# Allegro board Node2.brd
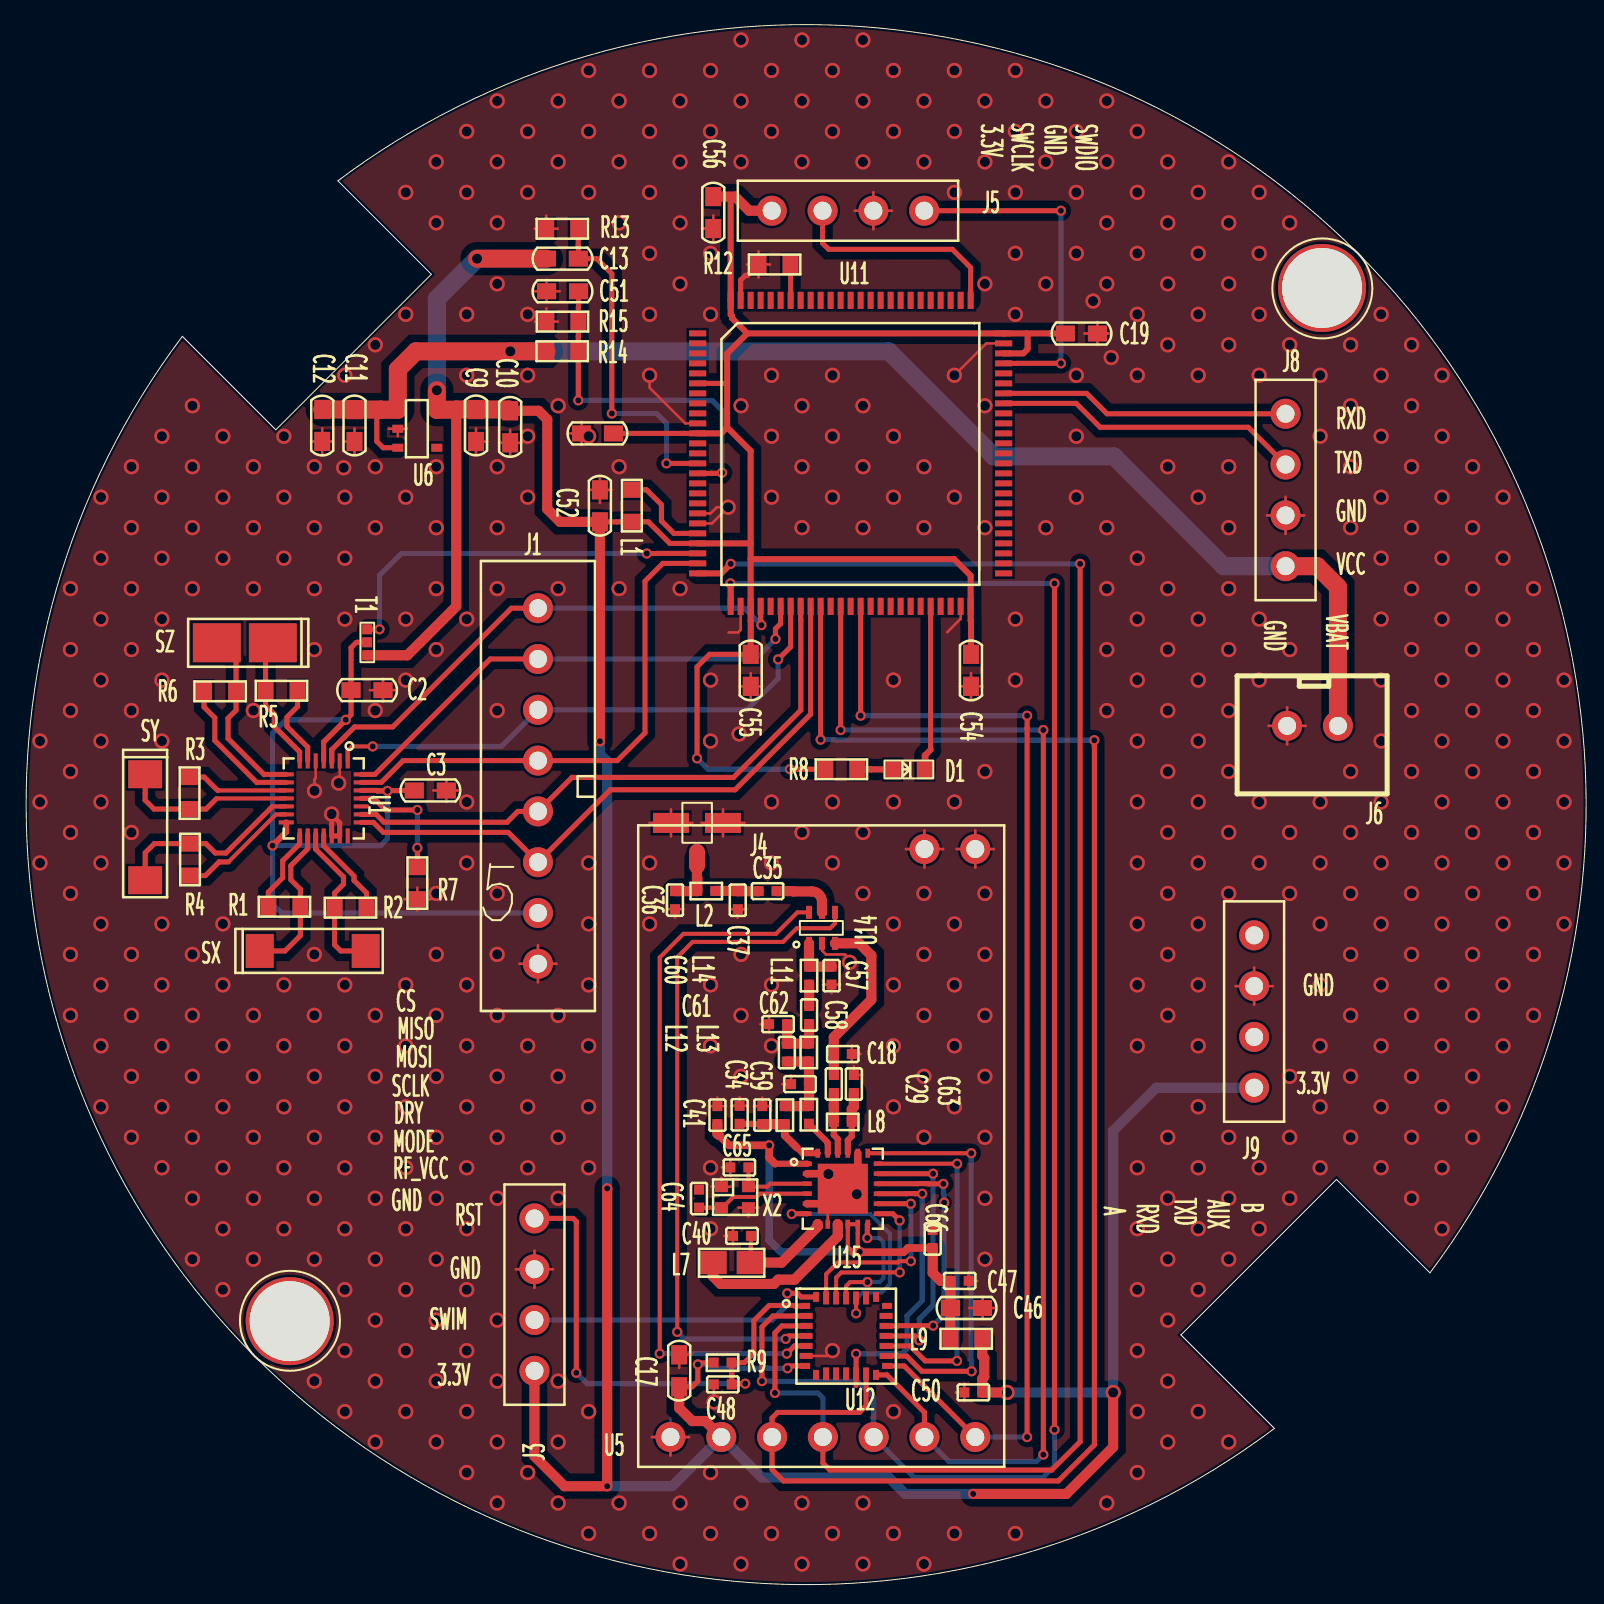
[diagram p0: board, top side]
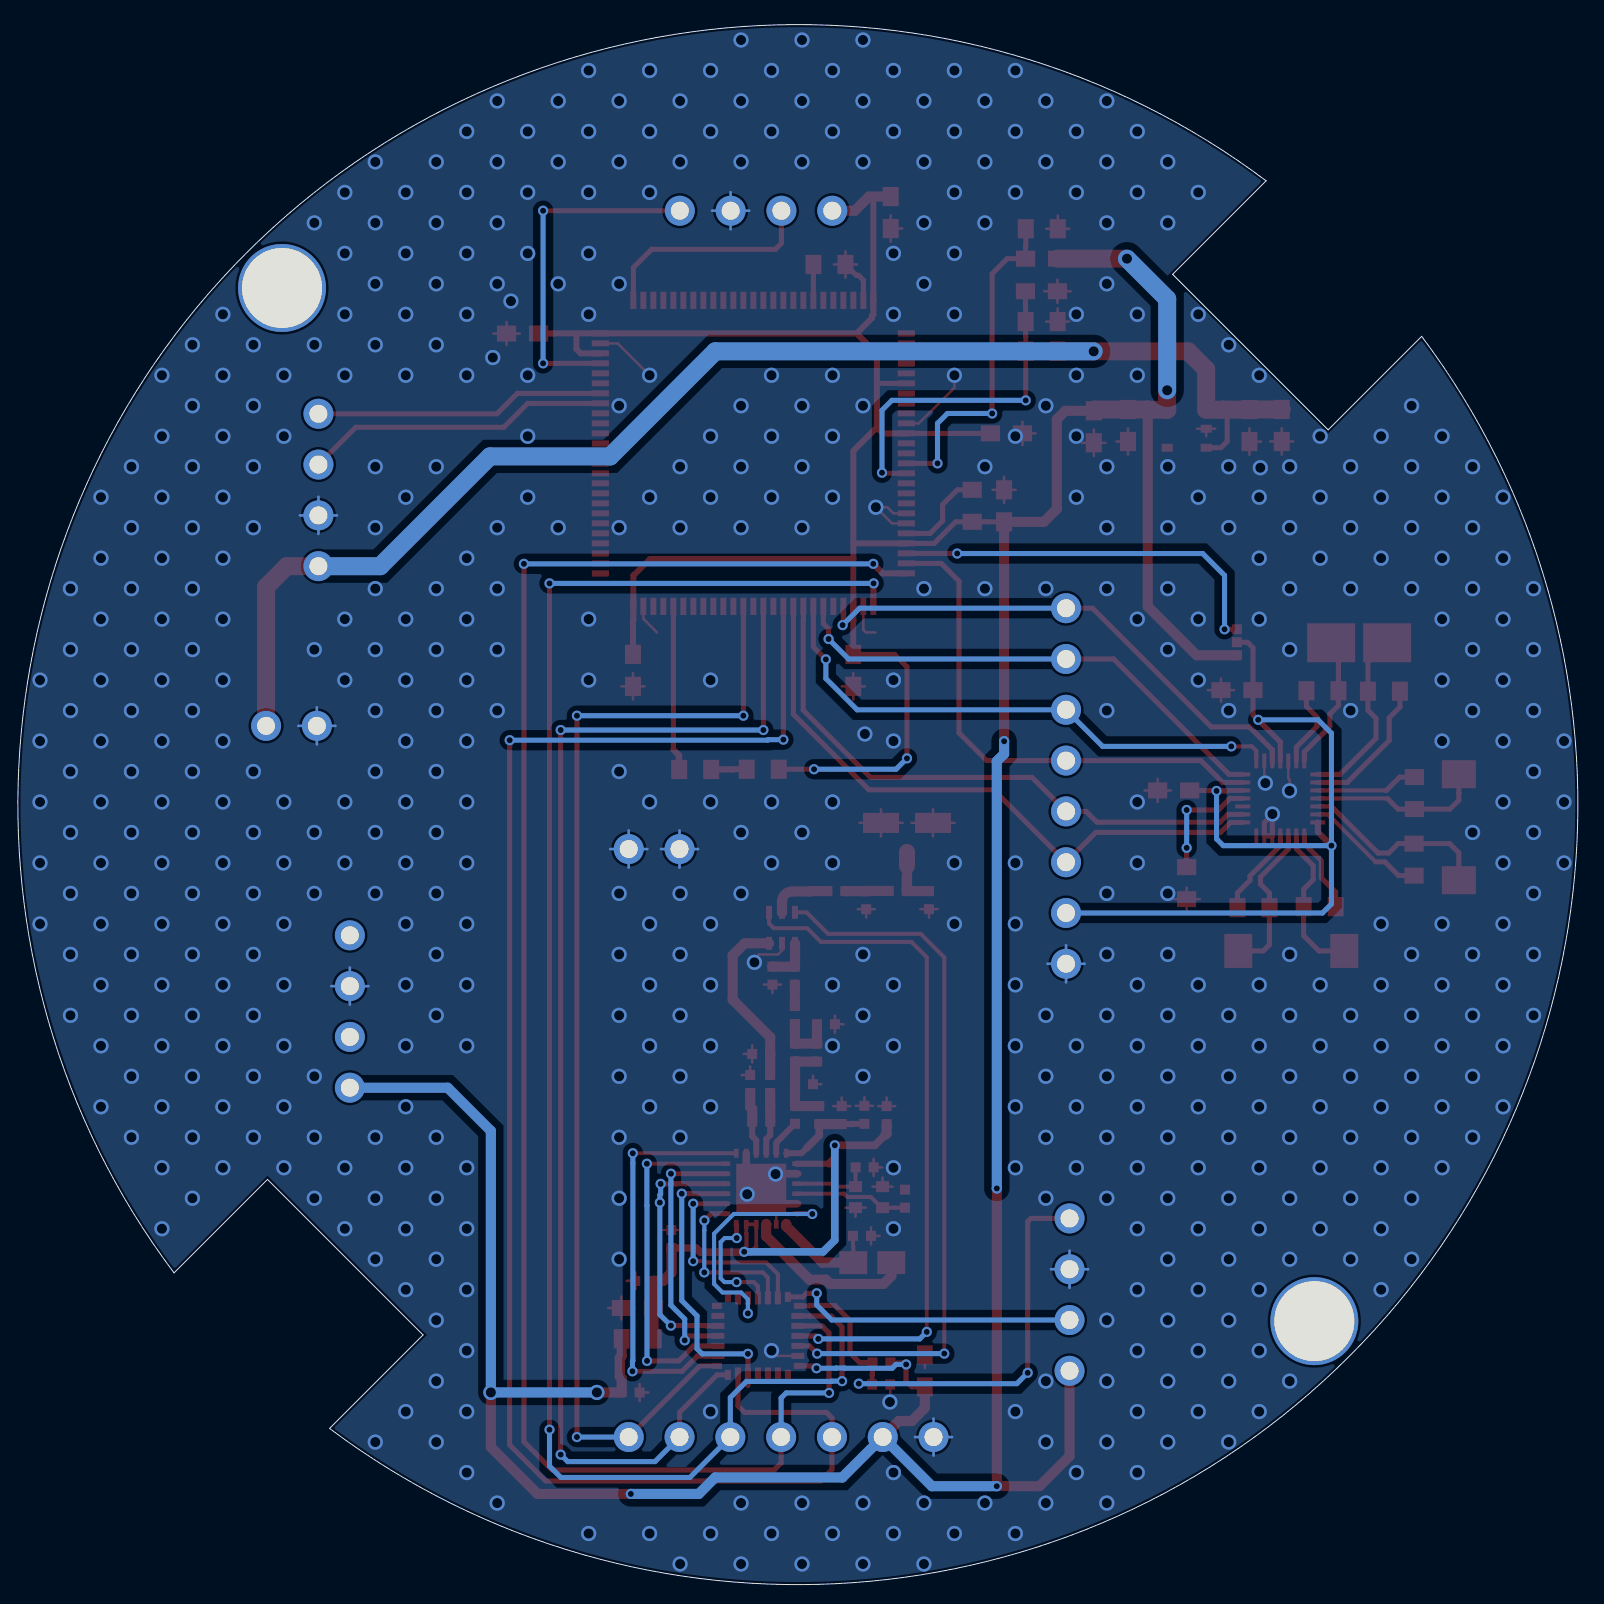
[diagram p1: board, bottom side, seen from below]

Outline 78 x 78 mm; copper layers: TOP, BOTTOM. Coordinates in mm from the lower left corner of the outline.
Outline path: 7.81,62.41 12.48,57.74 20.26,65.52 15.59,70.19 arc(66.58,66.58) 70.19,15.59 65.52,20.26 57.74,12.48 62.41,7.81 arc(11.42,11.42) 7.81,62.41

## Placement (name value [footprint] x y rotation side)
C2  10uF/10V  [C0603]  17.85 44.72 180 top
C3  0.1uF/10V  [C0603]  21.01 39.71 180 top
C9  10uF/10V  [C0603]  22.49 58.75 270 top
C10  0.1uF/10V  [C0603]  24.2 57.09 90 top
C11  10uF/10V  [C0603]  16.42 58.75 270 top
C12  0.1uF/10V  [C0603]  14.81 57.16 90 top
C13  0.1uF/10V  [C0603]  27.61 66.3 180 top
C17  0.1uF/10V  [C0603]  32.65 11.49 270 top
C18  GRM1555C1H1R0CA01  [C0402]  41.28 26.53 180 top
C19  0.1uF/10V  [C0603]  53.57 62.56 180 top
C29  GRM1555C1H4R7CA01#  [C0402]  40.39 24.58 90 top
C34  GRM1555C1H820GA01  [C0402]  35.67 23.94 270 top
C35  GRM1555C1H101JA01#  [C0402]  37.52 34.68 180 top
C36  NC  [C0402]  32.45 33.77 90 top
C37  NC  [C0402]  35.58 33.77 90 top
C40  GRM155R61A474KE15D  [C0402]  35.34 17.44 0 top
C41  GRM155R61A105KE15D  [C0402]  34.56 23.92 270 top
C46  10uF  [C0603]  47.82 13.83 180 top
C47  0.1uF  [C0402]  47.13 15.19 180 top
C48  47P  [C0402]  34.38 10.01 0 top
C50  0.1uF  [C0402]  46.91 9.61 0 top
C51  0.1uF/10V  [C0603]  26.02 64.67 0 top
C52  0.1uF/10V  [C0603]  28.69 54.74 270 top
C53  0.1uF/10V  [C0603]  27.77 57.56 0 top
C54  0.1uF/10V  [C0603]  47.24 44.92 90 top
C55  0.1uF/10V  [C0603]  36.23 44.91 90 top
C56  0.1uF/10V  [C0603]  34.36 67.8 90 top
C57  GRM1555C1H8R2BA01#  [C0402]  40.27 30.9 270 top
C58  GRM1555C1H101JA01  [C0402]  39.15 28.03 90 top
C59  GRM155R71C473KA01J  [C0402]  36.81 23.93 270 top
C60  GRM1555C1H3R6BA01D  [C0402]  38.03 27.05 270 top
C61  NC  [C0402]  38.24 25.02 0 top
C62  GRM1555C1H120GA01  [C0402]  37.15 28.02 0 top
C63  GRM1555C1H3R9BA01#  [C0402]  41.38 25.48 270 top
C64  8.2P  [C0402]  33.65 18.85 90 top
C65  8.2P  [C0402]  36.11 20.86 180 top
C66  GRM155R71C104KA88D  [C0402]  45.33 17.73 270 top
D1  F5F1  [LED0603]  43.34 40.76 0 top
J1  CON8  [CON_2_54_8P]  25.59 48.82 270 top
J3  -  [CON4]  25.42 10.69 90 top
J4  -  [IPX]  33.54 36.29 0 top
J5  -  [CON4]  37.28 68.69 0 top
J6  CON2  [XH_2_54_2P]  63.05 42.94 0 top
J8  -  [CON4]  62.97 58.54 270 top
J9  -  [CON4]  61.4 24.85 90 top
L1  600R@100MHz  [R0603]  30.29 53.14 90 top
L2  CRCW04020000Z0ED  [R0402]  34.46 34.69 180 top
L7  MLZ2012M150W  [R0805]  36.23 16.1 180 top
L8  LQW15AN33NH00D  [R0402]  41.28 23.14 180 top
L9  33nH  [R0603]  47.81 12.29 180 top
L11  LQG15HN18NJ02D  [R0402]  39.15 30 90 top
L12  LQG15HS56NJ02D  [R0402]  37.93 23.93 270 top
L13  33nH  [R0402]  39.14 23.04 90 top
L14  LQG15HS8N2J02D  [R0402]  39.14 26.16 90 top
R1  120/1%  [R0603]  12.11 33.89 0 top
R2  120/1%  [R0603]  17.02 33.84 180 top
R3  120/1%  [R0603]  8.17 40.38 270 top
R4  120/1%  [R0603]  8.19 35.45 90 top
R5  120/1%  [R0603]  13.57 44.69 180 top
R6  120/1%  [R0603]  8.9 44.67 0 top
R7  33K/1%  [R0603]  19.56 34.27 90 top
R8  1K  [R0603]  39.96 40.77 0 top
R9  10K  [R0402]  35.27 11.1 180 top
R12  100K  [R0603]  36.62 66.01 0 top
R13  100K  [R0603]  26 67.8 0 top
R14  100K/1%  [R0603]  27.61 61.67 180 top
R15  100K/1%  [R0603]  26.01 63.15 0 top
SX  INDUCTOR  [SEN-XY-F]  14.33 31.68 0 top
SY  INDUCTOR  [SEN-XY-F]  5.95 37.87 270 top
SZ  INDUCTOR  [SEN-Z-F]  10.94 47.09 180 top
T1  tp_3  [TP3]  17.05 47.12 270 top
T3  TEST  [HOLE4_4X4_0]  64.79 64.83 0 top
T4  TEST  [HOLE4_4X4_0]  13.18 13.18 0 top
U1  -  [13156]  14.88 39.31 270 top
U5  -  [APC340]  32.22 7.38 180 top
U6  XC6234H331VR-G/TPS780330200DDCT  [SOT23-5]  18.59 58.74 0 top
U11  STM32L433VCT6  [LQFP-100]  41.23 56.56 0 top
U12  STM8L151G6U6  [QFN28_NOLEAD_0_5]  41 12.44 0 top
U14  PE4259  [SC-70]  39.14 32.06 90 top
U15  SX1268  [QFN4X4]  40.83 19.8 0 top
X2  EXS00A-CS06465  [2_0X1_6]  34.77 18.85 0 top

## Library data of the parts
C2 C3 C10 C12 C13 C17-C19 C29 C34-C37 C40 C41 C46-C48 C50-C66 = CAP NP
C9 C11 = CAP POL
D1 = F5F1_0
J1 = CON8
J3 J5 J8 J9 = CON4
J4 = IPX
J6 = CON2
L1 L2 L7-L9 L11-L14 SX SY SZ = INDUCTOR
R1-R7 R13-R15 = R
R8 R9 R12 = RESISTOR
T1 = tp_3
T3 T4 = TEST
U1 = 13156_1
U5 = APC340
U6 = XC6234H331VR_0
U11 = STM32L433VCT6
U12 = STM8L151G6U6
U14 = PE4259
U15 = SX1268
X2 = CRY_0

## Footprints (pads in the part's own frame, mm; a bottom-side part is the same pattern mirrored in y, then rotated)
2_0X1_6
  rect 0.65x0.55 smd: 1(0,0) 2(1.35,0) 3(1.35,1.05) 4(0,1.05)
13156
  rect 0.75x0.2 smd: 1(-1.875,1.2) 2(-1.875,0.8) 3(-1.875,0.4) 4(-1.875,0) 5(-1.875,-0.4) 6(-1.875,-0.8) 7(-1.875,-1.2) 15(1.875,-1.2) 16(1.875,-0.8) 17(1.875,-0.4) 18(1.875,0) 19(1.875,0.4) 20(1.875,0.8) 21(1.875,1.2)
  rect 0.2x0.75 smd: 8(-1.2,-1.875) 9(-0.8,-1.875) 10(-0.4,-1.875) 11(0,-1.875) 12(0.4,-1.875) 13(0.8,-1.875) 14(1.2,-1.875) 22(1.2,1.875) 23(0.8,1.875) 24(0.4,1.875) 25(0,1.875) 26(-0.4,1.875) 27(-0.8,1.875) 28(-1.2,1.875)
APC340
  round 1.5 hole 0.9: 1(0,0) 2(-2.54,0) 3(-5.08,0) 4(-7.62,0) 5(-10.16,0) 6(-12.7,0) 7(-15.24,0) 8(-15.24,-29.4) 9(-12.7,-29.4)
C0402
  rect 0.5x0.5 smd: 1(0,0) 2(0.9,0)
C0603
  rect 0.96x0.8 smd: 1(0,0) 2(1.6,0)
CON4
  round 1.5 hole 0.9: 1(0,0) 2(2.54,0) 3(5.08,0) 4(7.62,0)
CON_2_54_8P
  round 1.5 hole 0.9: 1(0,0) 2(2.54,0) 3(5.08,0) 4(7.62,0) 5(10.16,0) 6(12.7,0) 7(15.24,0) 8(17.78,0)
HOLE4_4X4_0
  round 4.4 hole 4: 1(0,0)
IPX
  oval 0.8x1.5 smd: 1(0,0)
  rect 1.8x1 smd: 2(1.3,1.8) 3(-1.3,1.8)
LED0603
  rect 0.8x0.96 smd: 1(0,0) 2(1.6,0)
LQFP-100
  rect 0.86x0.3 smd: 1(-7.65,6) 2(-7.65,5.5) 3(-7.65,5) 4(-7.65,4.5) 5(-7.65,4) 6(-7.65,3.5) 7(-7.65,3) 8(-7.65,2.5) 9(-7.65,2) 10(-7.65,1.5) 11(-7.65,1) 12(-7.65,0.5) 13(-7.65,0) 14(-7.65,-0.5) 15(-7.65,-1) 16(-7.65,-1.5) 17(-7.65,-2) 18(-7.65,-2.5) 19(-7.65,-3) 20(-7.65,-3.5) 21(-7.65,-4) 22(-7.65,-4.5) 23(-7.65,-5) 24(-7.65,-5.5) 25(-7.65,-6) 51(7.65,-6) 52(7.65,-5.5) 53(7.65,-5) 54(7.65,-4.5) 55(7.65,-4) 56(7.65,-3.5) 57(7.65,-3) 58(7.65,-2.5) 59(7.65,-2) 60(7.65,-1.5) 61(7.65,-1) 62(7.65,-0.5) 63(7.65,0) 64(7.65,0.5) 65(7.65,1) 66(7.65,1.5) 67(7.65,2) 68(7.65,2.5) 69(7.65,3) 70(7.65,3.5) 71(7.65,4) 72(7.65,4.5) 73(7.65,5) 74(7.65,5.5) 75(7.65,6)
  rect 0.3x0.86 smd: 26(-6,-7.65) 27(-5.5,-7.65) 28(-5,-7.65) 29(-4.5,-7.65) 30(-4,-7.65) 31(-3.5,-7.65) 32(-3,-7.65) 33(-2.5,-7.65) 34(-2,-7.65) 35(-1.5,-7.65) 36(-1,-7.65) 37(-0.5,-7.65) 38(0,-7.65) 39(0.5,-7.65) 40(1,-7.65) 41(1.5,-7.65) 42(2,-7.65) 43(2.5,-7.65) 44(3,-7.65) 45(3.5,-7.65) 46(4,-7.65) 47(4.5,-7.65) 48(5,-7.65) 49(5.5,-7.65) 50(6,-7.65) 76(6,7.65) 77(5.5,7.65) 78(5,7.65) 79(4.5,7.65) 80(4,7.65) 81(3.5,7.65) 82(3,7.65) 83(2.5,7.65) 84(2,7.65) 85(1.5,7.65) 86(1,7.65) 87(0.5,7.65) 88(0,7.65) 89(-0.5,7.65) 90(-1,7.65) 91(-1.5,7.65) 92(-2,7.65) 93(-2.5,7.65) 94(-3,7.65) 95(-3.5,7.65) 96(-4,7.65) 97(-4.5,7.65) 98(-5,7.65) 99(-5.5,7.65) 100(-6,7.65)
QFN4X4
  rect 0.45x0.23 smd: 1(-1.775,1.25) 2(-1.775,0.75) 3(-1.775,0.25) 4(-1.775,-0.25) 5(-1.775,-0.75) 6(-1.775,-1.25) 13(1.775,-1.25) 14(1.775,-0.75) 15(1.775,-0.25) 16(1.775,0.25) 17(1.775,0.75) 18(1.775,1.25)
  rect 0.23x0.45 smd: 7(-1.25,-1.775) 8(-0.75,-1.775) 9(-0.25,-1.775) 10(0.25,-1.775) 11(0.75,-1.775) 12(1.25,-1.775) 19(1.25,1.775) 20(0.75,1.775) 21(0.25,1.775) 22(-0.25,1.775) 23(-0.75,1.775) 24(-1.25,1.775)
  rect 2.5x2.5 smd: 25(0,0)
QFN28_NOLEAD_0_5
  rect 0.5x0.3 smd: 1(-2.05,1.5) 7(-2.05,-1.5) 15(2.05,-1.5) 21(2.05,1.5)
  rect 0.65x0.3 smd: 2(-2,1) 3(-2,0.5) 4(-2,0) 5(-2,-0.5) 6(-2,-1) 16(2,-1) 17(2,-0.5) 18(2,0) 19(2,0.5) 20(2,1)
  rect 0.3x0.5 smd: 8(-1.5,-1.95) 14(1.5,-1.95) 22(1.5,1.95) 28(-1.5,1.95)
  rect 0.3x0.65 smd: 9(-1,-1.9) 10(-0.5,-1.9) 11(0,-1.9) 12(0.5,-1.9) 13(1,-1.9) 23(1,1.9) 24(0.5,1.9) 25(0,1.9) 26(-0.5,1.9) 27(-1,1.9)
R0402
  rect 0.5x0.5 smd: 1(0,0) 2(0.9,0)
R0603
  rect 0.8x0.96 smd: 1(0,0) 2(1.6,0)
R0805
  rect 1.4x1.15 smd: 1(0,0) 2(1.9,0)
SC-70
  rect 0.65x0.3 smd: 1(0,0) 2(0,-0.65) 3(0,-1.3) 4(1.55,-1.3) 5(1.55,-0.65) 6(1.55,0)
SEN-XY-F
  rect 1.4x1.7 smd: 1(-2.65,0) 2(2.65,0)
SEN-Z-F
  rect 2.4x1.95 smd: 1(-1.4,0) 2(1.4,0)
SOT23-5
  rect 0.55x0.4 smd: 1(0,0) 2(0,-0.95) 3(0,-1.9) 4(1.95,-1.9) 5(1.95,0)
TP3
  rect 0.5x0.5 smd: 1(-0.65,0) 2(0,0) 3(0.65,0)
XH_2_54_2P
  round 1.5 hole 0.9: 1(0,0) 2(2.54,0)

## Nets
GND: C2.1 C3.1 C9.2 C10.1 C11.2 C12.1 C17.1 C18.1 C19.1 C34.1 C36.1 C37.1 C40.1 C41.1 C46.1 C47.1 C48.1 C50.1 C51.1 C52.1 C53.1 C54.1 C55.1 C56.1 C57.2 C59.1 C61.1 C62.1 C63.1 C65.2 C66.1 J1.8 J3.3 J4.2(G#2) J4.3(G#3) J5.3 J6.1 J8.3 J9.3 R7.1 R12.1 R13.1 R15.1 U1.2(RES#2) U1.5(AVSS) U1.19(DVSS) U1.20(RES#20) U5.1(GND#1) U5.8(GND#8) U5.9(GND#9) U6.2(VSSS) U11.10(VSS#10) U11.19(VSSA) U11.20(VREF) U11.27(VSS#27) U11.49(VSS#49) U11.74(VSS#74) U11.99(VSS#99) U12.6(VSS1) U14.2(GND) U15.2(GND#2) U15.5(GND#5) U15.8(GND#8) U15.20(GND#20) U15.25(GND#25) X2.2(G#2) X2.4(G#4)
VBAT_ADC: C51.2 R14.1 R15.2 U11.15(PC0)
VCC: C11.1 C12.2 J6.2 J8.4 R14.2 U6.1(VIN) U6.3(CE)
VCC_3.3V: C9.1 C10.2 C13.2 C17.2 C19.2 C50.2 C52.2 C53.2 C54.2 C55.2 C56.2 J3.1 J5.1 J9.1 L1.1 L9.1 R8.1 R9.2 T1.3(S3#3) U5.2(VCC) U6.5(VOUT) U11.6(VBAT) U11.11(VDD#11) U11.22(VDDA) U11.28(VDD#28) U11.50(VDD#50) U11.73(VDDUSB) U11.75(VDD#75) U11.100(VDD#100) U12.7(VDD1)
VCC_RF: C41.2 C46.2 C47.2 C66.2 L9.2 U15.1(VDD_IN) U15.10(VBAT) U15.11(VBAT_IO)
VCC_RM: C2.2 C3.2 J1.7 T1.2(S3#2) U1.4(AVDD) U1.14(DVDD#14) U1.26(DVDD#26)
BUSY: U12.27(PC6) U15.14(BUSY)
DIO1: U12.26(PC5) U15.13(DIO1)
DIO2: U12.25(PC4) U15.12(DIO2/DATA)
DIO3: U12.24(PC3) U15.6(DIO3)
DIO4: U12.23(PC2)
DIO5: U12.22(PC1)
LORA_A: U5.3(SET_A) U11.35(PB0) U12.13(PB1)
LORA_AUX: U5.6(AUX) U11.37(PB2) U12.14(PB2)
LORA_B: U5.7(SET_B) U11.39(PE8) U12.15(PB3)
LORA_RST: U12.12(PB0) U15.15(NRESET)
LORA_RXD: U5.4(RXD) U11.25(PA2) U12.3(PA3/UART1_RXD)
LORA_TXD: U5.5(TXD) U11.26(PA3) U12.2(PA2/UART1_TXD)
NC1: U1.21(NC1)
NC2: U1.24(NC2)
RM3100_MODE_EN: J1.6 U1.22(I2C) U11.34(PC5)
RM_CS: J1.1 U1.3(SSN) U11.29(PA4)
RM_DRY: J1.5 U1.23(DRDY) U11.33(PC4)
RM_MISO: J1.2 U1.28(MISO) U11.31(PA6)
RM_MOSI: J1.3 U1.1(MOSI) U11.32(PA7)
RM_POWER: T1.1(S1) U11.23(PA0)
RM_SCLK: J1.4 U1.27(SCLK) U11.24(PA1)
RST: C48.2 J3.4 R9.1 U12.1(NRST)
RXD: J8.1 U11.69(PA10)
RXEN: U12.4(PA4) U14.4(CTRL)
SCLK: J5.2 U11.76(PA14)
SPI_MISO: U12.19(PB7/SPI_MISO) U15.16(MISO)
SPI_MOSI: U12.18(PB6/SPI_MOSI) U15.17(MOSI)
SPI_NSS: U12.16(PB4/SPI_NSS) U15.19(NSS)
SPI_SCK: U12.17(PB5/SPI_SCK) U15.18(SCK)
SWDIO: J5.4 U11.72(PA13)
SWIM: J3.2 U12.28(PA0)
TXD: J8.2 U11.68(PA9)
TXEN: U12.5(PA5) U14.6(VDD)
N01396: R1.2 SX.1 U1.16(XINP)
N01588: R2.2 SX.2 U1.17(XINN)
N01671: R3.1 U1.10(YDRVP)
N01689: R3.2 SY.1 U1.11(YINP)
N01747: R4.1 U1.13(YDRVN)
N01751: R4.2 SY.2 U1.12(YINN)
N01826: R5.1 U1.6(ZDRVP)
N01832: R5.2 SZ.1 U1.7(ZINP)
N01841: R6.1 U1.9(ZDRVN)
N01859: R6.2 SZ.2 U1.8(ZINN)
N01987: R7.2 U1.25(REXT)
N0020614: R1.1 U1.15(XDRVP)
N0020617: R2.1 U1.18(XDRVN)
N38925: U11.70(PA11)
N39346: L1.2 U11.21(VREF+)
N39977: R12.2 U11.94(PH3-BOOT0)
N40117: C13.1 R13.2 U11.14(NRST)
N69894: D1.1(ANODE) R8.2
N105609: L13.1 U15.23(RF_O)
N105629: C60.2 C61.2 L12.1 L13.2 L14.1
N105665: C34.2 C59.2 L12.2 U15.24(VR_PA)
N105721: C35.1 U14.5(RFC)
N105725: C35.2 C37.2 L2.1
N105729: C36.2 J4.1(ANT) L2.2
N105809: C18.2 C29.2 U14.3(RF2)
N105813: C29.1 L8.2 U15.22(RFI_N)
N105849: C63.2 L8.1 U15.21(RFI_P)
N105989: C58.1 C60.1 C62.2 L14.2
N106013: C57.1 L11.2 U14.1(RF1)
N106087: C58.2 L11.1
N106359: C64.1 U15.4(XTB) X2.1(IN)
N106387: C65.1 U15.3(XTA) X2.3(OUT)
N106409: L7.2 U15.9(DCC_SW)
N106429: C40.2 L7.1 U15.7(VREG)
N3877695: D1.2(CATHODE) U11.46(PE15)

Pads without a net: C64 2; J9 2 4; T3 1; T4 1; U6 4; U11 1 2 3 4 5 7 8 9 12 13 16 17 18 30 36 38 40 41 42 43 44 45 47 48 51 52 53 54 55 56 57 58 59 60 61 62 63 64 65 66 67 71 77 78 79 80 81 82 83 84 85 86 87 88 89 90 91 92 93 95 96 97 98; U12 8 9 10 11 20 21

## Via types
v1: diameter 0.508, hole 0.305, TOP to BOTTOM, 68 vias
v2: diameter 0.762, hole 0.508, TOP to BOTTOM, 574 vias

## Routing (per net, layer and track width the routed paths; a pad name or vN(x,y) marks a point on that pad's centre or on a via; arc(x,y) is an arc through that point)
GND: length 171.4
  TOP w0.127: J4.2 35.92,38.09 ; J4.2 34.84,37.41 ; J4.2 33.77,38.09 ; J4.2 34.84,38.76 ; R7.1 19.56,34.85 ; R7.1 20.22,34.27 ; R7.1 19.56,33.7 ; R7.1 18.9,34.27 ; J8.3 62.97,54.39 ; J8.3 62.97,52.53 ; J8.3 63.9,53.46 ; J8.3 62.04,53.46 ; U14.2 39.79,31.71 39.99,31.51 40.95,31.51 41.13,31.32 ; C34.1 36.1,23.94 ; C34.1 35.25,23.94 ; C34.1 35.67,24.37 ; 22.49,56.5 C9.2 ; C9.2 22.49,57.81 ; C9.2 23.07,57.15 ; U11.74 48.01,62.06 v2(46.41,60.47) ; 23.62,57.09 C10.1 ; C10.1 24.2,57.75 ; C10.1 24.2,56.43 ; C10.1 24.78,57.09 ; v2(14.42,39.69) 14.42,40.26 14.48,40.32 U1.5 ; X2.4 35.27,19.9 ; X2.4 34.77,20.35 ; X2.4 34.26,19.9 ; 35.61,18.85 X2.2 ; X2.2 36.62,18.85 ; X2.2 36.12,18.4 ; U5.8 47.46,37.71 ; U5.8 48.39,36.78 ; U5.8 46.53,36.78 ; U5.8 47.46,35.85 ; 25.43,63.15 R15.1 ; R15.1 26.59,63.15 ; R15.1 26.01,63.81 ; 18.59,57.42 U6.2 ; U6.2 19.04,57.79 ; U6.2 18.13,57.79 ; J3.3 25.42,16.7 ; J3.3 24.49,15.77 ; J3.3 25.42,14.84 ; J3.3 26.34,15.77 ; J9.3 61.4,30.85 ; J9.3 62.33,29.93 ; J9.3 61.4,29 ; J9.3 60.47,29.93 ; 37.82,25.02 C61.1 38.24,25.45 ; J6.1 63.98,42.94 ; J6.1 63.05,43.87 ; J6.1 63.05,42.01 ; J6.1 62.12,42.94 ; C36.1 32.87,33.77 ; C36.1 32.45,33.35 ; C36.1 32.02,33.77 ; U5.1 33.15,7.38 ; U5.1 32.22,6.45 ; U5.1 31.29,7.38 ; R12.1 37.2,66.01 ; R12.1 36.62,66.67 ; R12.1 36.04,66.01 ; R12.1 36.62,65.35 ; 21.01,39.13 C3.1 ; C3.1 21.67,39.71 ; C3.1 21.01,40.29 ; C3.1 20.35,39.71 ; J1.8 26.52,31.04 ; J1.8 25.59,31.97 ; J1.8 24.66,31.04 ; J1.8 25.59,30.11 ; 31.17,38.09 J4.3 ; J4.3 33.32,38.09 ; J4.3 32.24,38.76 ; J4.3 32.24,37.41 ; 28.11,54.74 C52.1 ; C52.1 29.27,54.74 ; C52.1 28.69,54.08 ; C52.1 28.69,55.4 ; C18.1 41.71,26.53 ; C18.1 41.28,26.96 ; C18.1 41.28,26.11 ; 25.43,67.8 R13.1 ; R13.1 26,68.45 ; R13.1 26.58,67.8 ; 15.84,57.15 C11.2 ; C11.2 16.42,56.49 ; C11.2 16.42,57.81 ; v2(15.63,40.08) 15.68,40.13 U1.2 ; C19.1 54.22,62.56 ; C19.1 53.57,63.13 ; C19.1 52.91,62.56 ; C19.1 53.57,61.98 ; C62.1 37.15,28.45 ; C62.1 37.15,27.59 ; C62.1 36.72,28.02 ; 36.23,44.26 C55.1 ; C55.1 36.81,44.91 ; C55.1 35.65,44.91 ; C55.1 36.23,45.57 ; C48.1 34.38,9.15 v2(34.4,9.13) ; J5.3 43.29,68.69 ; J5.3 42.36,67.77 ; J5.3 42.36,69.62 ; J5.3 41.43,68.69 ; U11.20 34.29,53.06 v2(35.1,53.87) 34.53,53.87 34.22,53.56 U11.19 ; C56.1 34.36,68.46 ; C56.1 33.78,67.8 ; C56.1 34.36,67.15 ; C46.1 48.48,13.83 ; C46.1 47.82,13.25 ; C46.1 47.16,13.83 ; C46.1 47.82,14.41 ; 35.16,33.77 C37.1 ; C37.1 36.01,33.77 ; C37.1 35.58,33.34 ; U5.9 44.92,37.71 ; U5.9 43.99,36.78 ; U5.9 45.85,36.78 ; U5.9 44.92,35.85 ; 46.05,47.62 46.06,47.62 46.73,48.29 U11.49 ; 35.21,20.43 C65.2 ; C65.2 35.21,21.29 ; C65.2 34.78,20.86 ; v2(40.32,11.7) 40.05,11.44 U12.6 ; 47.24,44.26 C54.1 ; C54.1 46.67,44.92 ; C54.1 47.82,44.92 ; C54.1 47.24,45.57 ; 32.65,10.83 C17.1 33.23,11.49 ; 47.13,14.76 C47.1 ; C47.1 47.13,15.62 ; C47.1 47.56,15.19 ; C12.1 14.81,57.82 ; C12.1 15.38,57.16 ; C12.1 14.81,56.5 ; C12.1 14.23,57.16 ; C2.1 17.85,45.3 ; C2.1 17.85,44.15 ; C2.1 17.19,44.72 ; C2.1 18.5,44.72 ; C59.1 37.24,23.93 ; C59.1 36.81,24.35 ; C59.1 36.38,23.93 ; 34.91,17.44 C40.1 ; C40.1 35.34,17.01 ; C40.1 35.34,17.86 ; 46.48,9.61 C50.1 ; C50.1 46.91,9.18 ; C50.1 46.91,10.04 ; 41.81,25.48 C63.1 41.38,25.91 ; C66.1 45.33,18.16 ; C66.1 45.75,17.73 ; C66.1 44.9,17.73 ; C51.1 26.02,65.25 ; C51.1 26.02,64.09 ; C51.1 25.37,64.67 ; C51.1 26.68,64.67 ; 27.77,56.98 C53.1 ; C53.1 27.11,57.56 ; C53.1 27.77,58.14 ; U11.10 32.96,58.06 31.17,59.84 v2(31.17,60.47) ; U15.8 40.08,19.05 U15.25 ; 35.12,47.61 35.6,47.61 35.73,47.74 U11.27 ; 34.13,23.92 C41.1 ; C41.1 34.56,24.35 ; C41.1 34.99,23.92 ; 40.27,29.57 C57.2 ; C57.2 39.84,30 ; C57.2 40.7,30
  TOP w0.254: U11.99 35.73,64.21 35.73,65.22 35.97,65.46 36.08,65.46 R12.1 ; U1.19 U1.20 15.68,38.09 15.3,38.48 15.28,38.46 U1.19
  TOP w0.381: U15.25 40.84,19.8 40.84,19.81 41.24,20.22 41.26,20.22 41.58,20.55 U15.20 ; U15.25 40.08,19.05 U15.5 ; U15.25 40.08,20.55 U15.2
  BOTTOM w0.127: 46.53,36.78 U5.8 ; U5.8 48.39,36.78 ; U5.8 47.46,35.85 ; U5.8 47.46,37.71 ; 41.43,68.69 J5.3 ; J5.3 43.29,68.69 ; J5.3 42.36,69.62 ; J5.3 42.36,67.77 ; J1.8 25.59,31.97 ; J1.8 25.59,30.11 ; J1.8 24.66,31.04 ; J1.8 26.52,31.04 ; 62.12,42.94 J6.1 ; J6.1 63.05,43.87 ; J6.1 63.98,42.94 ; J6.1 63.05,42.01 ; 62.04,53.46 J8.3 ; J8.3 63.9,53.46 ; J8.3 62.97,54.39 ; J8.3 62.97,52.53 ; J3.3 25.42,16.7 ; J3.3 26.34,15.77 ; J3.3 24.49,15.77 ; J3.3 25.42,14.84 ; U5.1 32.22,8.31 ; U5.1 33.15,7.38 ; U5.1 32.22,6.45 ; U5.1 31.29,7.38 ; J9.3 61.4,30.85 ; J9.3 62.33,29.93 ; J9.3 61.4,29 ; J9.3 60.47,29.93 ; U5.9 44.92,37.71 ; U5.9 43.99,36.78 ; U5.9 44.92,35.85 ; U5.9 45.85,36.78
  vias: v2(0.69,42.18) v2(0.69,39.13) v2(0.69,36.08) v2(2.22,49.8) v2(2.22,46.75) v2(2.22,43.7) v2(2.22,40.66) v2(2.22,37.61) v2(2.22,34.56) v2(2.22,31.51) v2(2.22,28.46) v2(3.74,54.37) v2(3.74,51.32) v2(3.74,48.28) v2(3.74,45.23) v2(3.74,42.18) v2(3.74,39.13) v2(3.74,36.08) v2(3.74,33.04) v2(3.74,29.99) v2(3.74,26.94) v2(3.74,23.89) v2(5.27,55.9) v2(5.27,52.85) v2(5.27,49.8) v2(5.27,46.75) v2(5.27,43.7) v2(5.27,37.61) v2(5.27,31.51) v2(5.27,28.46) v2(5.27,25.42) v2(5.27,22.37) v2(6.79,57.42) v2(6.79,54.37) v2(6.79,51.32) v2(6.79,48.28) v2(6.79,45.23) v2(6.79,42.18) v2(6.79,33.04) v2(6.79,29.99) v2(6.79,26.94) v2(6.79,23.89) v2(6.79,20.84) v2(8.31,58.94) v2(8.31,55.9) v2(8.31,52.85) v2(8.31,49.8) v2(8.31,31.51) v2(8.31,28.46) v2(8.31,25.42) v2(8.31,22.37) v2(8.31,19.32) v2(8.31,16.27) v2(9.84,57.42) v2(9.84,54.37) v2(9.84,51.32) v2(9.84,33.04) v2(9.84,29.99) v2(9.84,26.94) v2(9.84,23.89) v2(9.84,20.84) v2(9.84,17.8) v2(9.84,14.75) v2(11.36,55.9) v2(11.36,52.85) v2(11.36,49.8) v2(11.36,43.7) v2(11.36,28.46) v2(11.36,25.42) v2(11.36,22.37) v2(11.36,19.32) v2(11.36,16.27) v2(12.89,57.42) v2(12.89,54.37) v2(12.89,51.32) v2(12.89,29.99) v2(12.89,26.94) v2(12.89,23.89) v2(12.89,20.84) v2(12.89,17.8) v2(14.41,55.9) v2(14.41,52.85) v2(14.41,49.8) v2(14.41,46.75) v2(14.41,31.51) v2(14.41,28.46) v2(14.41,25.42) v2(14.41,22.37) v2(14.41,19.32) v2(14.41,16.27) v2(14.41,10.18) v2(15.27,38.53) v2(15.93,60.47) v2(15.88,55.84) v2(15.93,54.37) v2(15.93,51.32) v2(15.93,48.28) v2(15.93,29.99) v2(15.93,26.94) v2(15.93,23.89) v2(15.93,20.84) v2(15.93,17.8) v2(15.93,14.75) v2(15.93,11.7) v2(15.93,8.65) v2(17.46,61.99) v2(17.46,55.9) v2(17.46,52.85) v2(17.46,43.7) v2(17.46,28.46) v2(17.46,25.42) v2(17.46,22.37) v2(17.46,19.32) v2(17.46,16.27) v2(17.46,13.22) v2(17.46,10.18) v2(17.46,7.13) v2(18.98,69.61) v2(18.98,63.52) v2(18.98,54.37) v2(18.98,48.28) v2(18.98,45.23) v2(18.98,29.99) v2(18.98,26.94) v2(18.98,23.89) v2(18.98,20.84) v2(18.98,17.8) v2(18.98,14.75) v2(18.98,11.7) v2(18.98,8.65) v2(20.51,71.14) v2(20.51,68.09) v2(20.51,55.9) v2(20.51,52.85) v2(20.51,49.8) v2(20.51,46.75) v2(20.51,34.56) v2(20.51,31.51) v2(20.51,28.46) v2(20.51,25.42) v2(20.51,22.37) v2(20.51,19.32) v2(20.51,16.27) v2(20.51,13.22) v2(20.51,10.18) v2(20.51,7.13) v2(22.03,72.66) v2(22.03,69.61) v2(22.03,63.52) v2(22.03,60.47) v2(22.03,48.28) v2(22.03,39.13) v2(22.03,36.08) v2(22.03,29.99) v2(22.03,26.94) v2(22.03,23.89) v2(22.03,20.84) v2(22.03,17.8) v2(22.03,14.75) v2(22.03,11.7) v2(22.03,8.65) v2(22.03,5.6) v2(23.55,74.18) v2(23.55,71.14) v2(23.55,68.09) v2(23.55,65.04) v2(23.55,55.9) v2(23.55,52.85) v2(23.55,49.8) v2(23.55,43.7) v2(23.55,34.56) v2(23.55,31.51) v2(23.55,28.46) v2(23.55,25.42) v2(23.55,22.37) v2(23.55,19.32) v2(23.55,13.22) v2(23.55,10.18) v2(23.55,7.13) v2(23.55,4.08) v2(25.08,72.66) v2(25.08,69.61) v2(25.08,63.52) v2(25.08,60.47) v2(25.08,57.42) v2(25.08,54.37) v2(25.08,26.94) v2(25.08,23.89) v2(25.08,20.84) v2(25.08,5.6) v2(26.6,74.18) v2(26.6,71.14) v2(26.6,58.94) v2(26.6,49.8) v2(26.6,28.46) v2(26.6,25.42) v2(26.6,22.37) v2(26.6,19.32) v2(26.6,10.18) v2(26.6,7.13) v2(26.6,4.08) v2(28.13,75.71) v2(28.13,72.66) v2(28.13,69.61) v2(28.13,57.42) v2(28.13,36.08) v2(28.13,33.04) v2(28.13,29.99) v2(28.13,26.94) v2(28.13,23.89) v2(28.13,20.84) v2(28.13,8.65) v2(28.13,2.56) v2(29.65,74.18) v2(29.65,71.14) v2(29.65,68.09) v2(29.65,55.9) v2(29.65,49.8) v2(29.65,4.08) v2(31.17,75.71) v2(31.17,72.66) v2(31.17,69.61) v2(31.17,66.56) v2(31.17,63.52) v2(31.17,36.08) v2(31.17,33.04) v2(31.17,2.56) v2(32.7,74.18) v2(32.7,71.14) v2(32.7,68.09) v2(32.7,65.04) v2(32.7,49.8) v2(32.7,4.08) v2(32.7,1.03) v2(34.22,75.71) v2(34.22,72.66) v2(34.22,66.56) v2(34.22,63.52) v2(34.22,45.23) v2(34.22,42.18) v2(34.22,29.99) v2(34.22,26.94) v2(34.22,20.84) v2(34.22,17.8) v2(34.22,5.6) v2(34.22,2.56) v2(35.65,42.53) v2(35.75,77.23) v2(35.75,74.18) v2(35.75,71.14) v2(35.75,58.94) v2(35.75,31.51) v2(35.75,28.46) v2(35.75,25.42) v2(35.75,4.08) v2(35.75,1.03) v2(37.27,75.71) v2(37.27,72.66) v2(37.27,60.47) v2(37.27,57.42) v2(37.27,54.37) v2(37.27,39.13) v2(37.27,36.08) v2(37.27,29.99) v2(37.27,26.94) v2(37.27,2.56) v2(38.79,77.23) v2(38.79,74.18) v2(38.79,71.14) v2(38.79,58.94) v2(38.79,55.9) v2(38.79,52.85) v2(38.79,37.61) v2(38.79,4.08) v2(38.79,1.03) v2(40.11,20.53) v2(40.32,75.71) v2(40.32,72.66) v2(40.32,60.47) v2(40.32,57.42) v2(40.32,54.37) v2(40.32,39.13) v2(40.32,36.08) v2(40.32,2.56) v2(41.17,31.11) v2(41.53,19.52) v2(41.84,77.23) v2(41.84,74.18) v2(41.84,71.14) v2(41.84,58.94) v2(41.84,55.9) v2(41.84,52.85) v2(41.84,37.61) v2(41.84,34.56) v2(41.84,4.08) v2(41.84,1.03) v2(43.37,75.71) v2(43.37,72.66) v2(43.37,57.42) v2(43.37,54.37) v2(43.37,45.23) v2(43.37,39.13) v2(43.37,33.04) v2(43.37,29.99) v2(43.37,26.94) v2(43.37,23.89) v2(43.37,8.65) v2(43.37,2.56) v2(44.89,74.18) v2(44.89,71.14) v2(44.89,55.9) v2(44.89,52.85) v2(44.89,34.56) v2(44.89,31.51) v2(44.89,28.46) v2(44.89,25.42) v2(44.89,22.37) v2(44.89,1.03) v2(46.41,75.71) v2(46.41,72.66) v2(46.41,69.61) v2(46.41,54.37) v2(46.41,39.13) v2(46.41,33.04) v2(46.41,29.99) v2(46.41,26.94) v2(46.41,23.89) v2(46.41,2.56) v2(47.94,74.18) v2(47.94,71.14) v2(47.94,65.04) v2(47.94,58.94) v2(47.94,52.85) v2(47.94,40.66) v2(47.94,34.56) v2(47.94,31.51) v2(47.94,28.46) v2(47.94,25.42) v2(47.94,22.37) v2(47.94,19.32) v2(47.94,16.27) v2(49.46,75.71) v2(49.46,72.66) v2(49.46,69.61) v2(49.46,66.56) v2(49.46,63.52) v2(49.46,48.28) v2(49.46,45.23) v2(49.46,2.56) v2(50.99,74.18) v2(50.99,71.14) v2(50.99,65.04) v2(50.99,52.85) v2(52.51,72.66) v2(52.51,69.61) v2(52.51,66.56) v2(52.51,60.47) v2(52.51,57.42) v2(52.51,54.37) v2(53.35,64.18) v2(54.03,74.18) v2(54.03,71.14) v2(54.03,68.09) v2(54.03,65.04) v2(54.03,52.85) v2(54.03,49.8) v2(54.03,46.75) v2(54.03,43.7) v2(54.03,4.08) v2(54.25,61.35) v2(55.56,72.66) v2(55.56,69.61) v2(55.56,66.56) v2(55.56,63.52) v2(55.56,60.47) v2(55.56,51.32) v2(55.56,48.28) v2(55.56,45.23) v2(55.56,42.18) v2(55.56,39.13) v2(55.56,36.08) v2(55.56,33.04) v2(55.56,29.99) v2(55.56,26.94) v2(55.56,20.84) v2(55.56,17.8) v2(55.56,14.75) v2(55.56,11.7) v2(55.56,8.65) v2(55.56,5.6) v2(57.08,71.14) v2(57.08,68.09) v2(57.08,65.04) v2(57.08,61.99) v2(57.08,55.9) v2(57.08,49.8) v2(57.08,46.75) v2(57.08,43.7) v2(57.08,40.66) v2(57.08,37.61) v2(57.08,34.56) v2(57.08,31.51) v2(57.08,28.46) v2(57.08,22.37) v2(57.08,19.32) v2(57.08,16.27) v2(57.08,13.22) v2(57.08,10.18) v2(57.08,7.13) v2(58.61,69.61) v2(58.61,66.56) v2(58.61,63.52) v2(58.61,60.47) v2(58.61,54.37) v2(58.61,48.28) v2(58.61,45.23) v2(58.61,42.18) v2(58.61,39.13) v2(58.61,36.08) v2(58.61,33.04) v2(58.61,29.99) v2(58.61,26.94) v2(58.61,23.89) v2(58.61,20.84) v2(58.61,17.8) v2(58.61,14.75) v2(58.61,8.65) v2(60.13,71.14) v2(60.13,68.09) v2(60.13,65.04) v2(60.13,61.99) v2(60.13,55.9) v2(60.13,52.85) v2(60.13,49.8) v2(60.13,46.75) v2(60.13,43.7) v2(60.13,40.66) v2(60.13,37.61) v2(60.13,34.56) v2(60.13,22.37) v2(60.13,19.32) v2(60.13,16.27) v2(60.13,7.13) v2(61.65,69.61) v2(61.65,66.56) v2(61.65,63.52) v2(61.65,60.47) v2(61.65,48.28) v2(61.65,45.23) v2(61.65,39.13) v2(61.65,36.08) v2(61.65,20.84) v2(61.65,17.8) v2(63.18,68.09) v2(63.18,61.99) v2(63.18,46.75) v2(63.18,37.61) v2(63.18,34.56) v2(63.18,25.42) v2(63.18,22.37) v2(63.18,19.32) v2(64.7,60.47) v2(64.7,57.42) v2(64.7,39.13) v2(64.7,36.08) v2(64.7,33.04) v2(64.7,29.99) v2(64.7,26.94) v2(64.7,23.89) v2(64.7,20.84) v2(66.23,61.99) v2(66.23,58.94) v2(66.23,55.9) v2(66.23,52.85) v2(66.23,40.66) v2(66.23,37.61) v2(66.23,34.56) v2(66.23,31.51) v2(66.23,28.46) v2(66.23,25.42) v2(66.23,22.37) v2(67.75,63.52) v2(67.75,60.47) v2(67.75,57.42) v2(67.75,54.37) v2(67.75,51.32) v2(67.75,48.28) v2(67.75,45.23) v2(67.75,42.18) v2(67.75,39.13) v2(67.75,36.08) v2(67.75,33.04) v2(67.75,29.99) v2(67.75,26.94) v2(67.75,23.89) v2(67.75,20.84) v2(69.27,61.99) v2(69.27,58.94) v2(69.27,55.9) v2(69.27,52.85) v2(69.27,49.8) v2(69.27,46.75) v2(69.27,43.7) v2(69.27,40.66) v2(69.27,37.61) v2(69.27,34.56) v2(69.27,31.51) v2(69.27,28.46) v2(69.27,25.42) v2(69.27,22.37) v2(69.27,19.32) v2(70.8,60.47) v2(70.8,57.42) v2(70.8,54.37) v2(70.8,51.32) v2(70.8,48.28) v2(70.8,45.23) v2(70.8,42.18) v2(70.8,39.13) v2(70.8,36.08) v2(70.8,33.04) v2(70.8,29.99) v2(70.8,26.94) v2(70.8,23.89) v2(70.8,20.84) v2(70.8,17.8) v2(72.32,55.9) v2(72.32,52.85) v2(72.32,49.8) v2(72.32,46.75) v2(72.32,43.7) v2(72.32,40.66) v2(72.32,37.61) v2(72.32,34.56) v2(72.32,31.51) v2(72.32,28.46) v2(72.32,25.42) v2(72.32,22.37) v2(73.85,54.37) v2(73.85,51.32) v2(73.85,48.28) v2(73.85,45.23) v2(73.85,42.18) v2(73.85,39.13) v2(73.85,36.08) v2(73.85,33.04) v2(73.85,29.99) v2(73.85,26.94) v2(73.85,23.89) v2(75.37,49.8) v2(75.37,46.75) v2(75.37,43.7) v2(75.37,40.66) v2(75.37,37.61) v2(75.37,34.56) v2(75.37,31.51) v2(75.37,28.46) v2(76.89,45.23) v2(76.89,42.18) v2(76.89,39.13) v2(76.89,36.08) v2(76.89,33.04)
VBAT_ADC: length 17.2
  TOP w0.254: U11.15 34.26,55.56 34.26,55.57 34.77,55.57 v1(34.79,55.59) ; C51.2 27.62,63.9 27.61,63.89 R15.2 27.61,62.42 27.61,62.41 R14.1 v1(27.61,59.21)
  BOTTOM w0.254: v1(27.61,59.21) 34.3,59.21 34.79,58.72 v1(34.79,55.59)
VCC: length 69.7
  TOP w0.254: U6.3 17.85,56.84 17.53,57.16 17.53,58.55 17.73,58.74
  TOP w0.9: J8.4 64.55,50.92 65.59,49.88 J6.2 ; R14.2 26,61.66 v2(24.21,61.66) 19.49,61.66 18.59,60.76 U6.1 17.73,58.74 17.73,58.75 C11.1 16.41,58.76 C12.2
  BOTTOM w0.9: J8.4 59.88,50.92 54.39,56.41 48.39,56.41 43.13,61.66 v2(24.21,61.66)
VCC_3.3V: length 260.8
  TOP w0.254: R9.2 34.36,11.09 33.67,11.09 v1(33.59,11.01) 33.59,10.17 33.31,9.89 C17.2 ; C52.2 29.55,53.14 29.55,53.14 L1.1 31.11,53.14 32.19,52.06 U11.22 ; v1(33.55,41.31) 33.55,45.89 34.17,46.51 C55.2 ; U11.11 32.89,57.56 32.89,57.56 C53.2 ; v1(38.07,10.82) 38.18,10.94 U12.7 ; R8.1 v1(38.19,40.77) ; U11.6 35.05,60.06
  TOP w0.3: 35.05,57.86 36.23,56.69 36.23,52.06 ; 35.05,57.86 34.75,57.56 U11.11 ; 35.05,57.86 35.05,61.55 36.06,62.56 ; 36.06,62.56 U11.75 50.01,62.56 ; 36.06,62.56 35.3,63.32 35.3,63.43 35.23,63.51 35.23,64.21 ; 35.23,64.21 U11.100 35.23,64.21 ; 35.23,64.21 35.23,69.19 35.44,69.4 ; C54.2 47.24,48.19 47.23,48.21 U11.50 47.23,50.45 46.4,51.28 36.25,51.28 36.23,51.29 ; C19.2 51.21,62.56 51.2,62.56 50.01,62.56 ; 50.01,62.56 50.07,62.5 50.07,61.77 49.86,61.56 U11.73 ; 36.23,51.29 36.23,52.06 ; 36.23,51.29 36.23,48.91 ; 36.23,52.06 U11.22 ; 36.23,48.91 36.23,48.21 36.23,48.2 C55.2 ; 36.23,48.91 U11.28 36.23,48.91
  TOP w0.508: v1(29.05,19.81) v1(29.05,4.92) 26.92,4.92 25.42,6.42 J3.1 ; C10.2 25.62,58.69 26.05,58.26 26.05,53.78 26.7,53.14 C52.2 v1(28.69,42.17) ; v1(47.35,4.53) 52.01,4.53 54.35,6.88 v2(54.35,9.61) ; L9.1 47.81,11.43 47.91,11.33 47.91,10.4 47.81,10.31 C50.2 v2(49.05,9.61) ; C17.2 32.65,8.83 33.3,8.18 33.96,8.18 U5.2 ; J5.1 36.15,68.69 35.44,69.4 C56.2 ; T1.3 19.06,46.47 21.51,48.91 21.51,58.74
  TOP w0.9: v2(20.54,59.72) U6.5 21.51,58.74 21.52,58.75 C9.1 24.14,58.75 C10.2 ; v2(22.55,66.3) C13.2
  BOTTOM w0.254: v1(38.19,40.77) 34.09,40.77 v1(33.55,41.31) ; v1(38.07,10.82) 37.09,10.82 37.08,10.83 36.66,10.83 36.65,10.82 34.29,10.82 34.09,11.01 v1(33.59,11.01)
  BOTTOM w0.508: v1(29.05,19.81) 29.05,41.17 28.69,41.54 v1(28.69,42.17) ; v1(47.35,4.53) 43.96,4.53 43.13,5.36 36.78,5.36 U5.2 32.3,4.92 v1(29.05,4.92) ; J9.1 56.51,24.85 54.35,22.69 v2(54.35,9.61) v2(49.05,9.61)
  BOTTOM w0.9: v2(22.55,66.3) 20.54,64.29 v2(20.54,59.72)
VCC_RF: length 28.2
  TOP w0.203: v1(41.69,16.64) 41.58,16.75 41.58,17.56 41.58,17.57 U15.11 U15.10 41.08,16.89 41.35,16.62
  TOP w0.305: U15.1 37.45,21.05
  TOP w0.381: 34.63,22.49 35.15,21.97 v1(37.15,21.97) 37.15,21.39 37.16,21.39 37.16,21.33 37.45,21.05 ; 41.35,16.62 43.88,16.62 44.09,16.83 C66.2
  TOP w0.508: C41.2 34.56,22.56 34.63,22.49 ; C66.2 45.33,15.59 45.73,15.19 C47.2 46.22,15.18 C46.2 46.21,13.82 L9.2
  BOTTOM w0.381: v1(37.15,21.97) 37.15,17.22 37.74,16.64 v1(41.69,16.64)
VCC_RM: length 47.6
  TOP w0.254: U1.4 14.88,42.12 ; 14.88,42.12 16.25,43.49 C2.2 16.25,46.85 16.51,47.11 16.54,47.11 16.55,47.12 T1.2 ; 14.88,42.12 14.88,42.14 v1(15.98,43.24) ; U1.26 17.53,39.71 17.55,39.7 ; 17.55,39.7 18.67,39.7 18.68,39.71 C3.2 ; 17.55,39.7 17.56,39.69 v1(18.07,39.69)
  TOP w0.3: U1.14 13,37.63 v1(12.32,36.95)
  BOTTOM w0.254: v1(15.98,43.24) 12.99,43.24 12.32,42.57 v1(12.32,36.95) ; v1(12.32,36.95) 12.32,34.03 12.77,33.58 J1.7 ; v1(12.32,36.95) 17.73,36.95 18.07,37.29 v1(18.07,39.69)
BUSY: length 10.2
  TOP w0.203: v1(44.23,16.17) 43.64,16.17 43.58,16.11 40.59,16.11 40,15.52 U12.27
  TOP w0.254: U15.14 v1(44.23,19.05)
  BOTTOM w0.254: v1(44.23,19.05) v1(44.23,16.17)
DIO1: length 8.1
  TOP w0.203: U12.26 40.5,15.35 40.76,15.61 43.2,15.61 v1(43.68,15.61)
  TOP w0.254: v1(43.67,18.21) 43.34,18.55 U15.13
  BOTTOM w0.203: v1(43.67,18.21) 43.67,17.73 43.68,17.72 v1(43.68,15.61)
DIO2: length 6
  TOP w0.203: U12.25 41,14.92 41.2,15.13 v1(42.06,15.13)
  TOP w0.254: U15.12 42.06,18 v1(42.06,17.33)
  BOTTOM w0.203: v1(42.06,17.33) 42.66,17.33 42.86,17.13 42.86,15.32 42.67,15.13 v1(42.06,15.13)
DIO3: length 12.1
  TOP w0.203: U12.24 v1(41.5,13.56)
  TOP w0.254: U15.6 38.29,18.55 v1(38.28,18.53)
  BOTTOM w0.203: v1(41.5,13.56) 41.5,14.04 41.49,14.05 41.49,14.26 41.84,14.61 42.77,14.61 43.19,15.03 43.19,17.55 42.2,18.53 v1(38.28,18.53)
LORA_A: length 81.8
  TOP w0.254: U11.35 v1(39.73,42.25) ; U12.13 42,8.94 41.67,8.61 37.58,8.61 37.3,8.33 U5.3 37.3,5.75 37.87,5.18 51.61,5.18 53.41,6.99 53.41,41.91 53.41,41.92 v1(53.41,42.22)
  BOTTOM w0.254: v1(53.41,42.22) 40.52,42.22 40.49,42.25 v1(39.73,42.25)
LORA_AUX: length 63.6
  TOP w0.254: U5.6 44.92,8.61 43.04,10.49 U12.14 ; U11.37 v1(40.73,42.73) ; v1(50.86,6.5) v1(50.86,42.73)
  BOTTOM w0.254: v1(50.86,6.5) 50.51,6.15 46.15,6.15 U5.6 ; v1(40.73,42.73) v1(50.86,42.73)
LORA_B: length 58.3
  TOP w0.254: v1(50.05,7.38) 50.05,42.83 v1(50.05,43.45) ; U12.15 43.9,10.94 U5.7 ; U11.39 v1(41.73,43.45)
  BOTTOM w0.254: v1(41.73,43.45) v1(50.05,43.45) ; U5.7 v1(50.05,7.38)
LORA_RST: length 14.5
  TOP w0.254: U15.15 44.02,19.55 44.02,19.55 44.45,19.55 44.45,19.55 v1(44.81,19.55) ; v1(41.5,11.54) 41.5,10.54 U12.12 41.5,9.96
  BOTTOM w0.254: v1(44.81,19.55) 44.81,14.2 44.04,13.44 44.04,11.79 43.79,11.54 v1(41.5,11.54)
LORA_RXD: length 87.3
  TOP w0.254: U5.4 39.84,6.08 40.19,5.73 51.28,5.73 52.7,7.15 v1(52.7,51.04) ; U12.3 37.79,12.94 37.44,12.59 v1(37.44,9.58)
  TOP w0.305: v1(35.23,51.04) 34.75,50.56 U11.25
  BOTTOM w0.254: v1(37.44,9.58) 39.58,9.58 39.84,9.33 U5.4 ; v1(52.7,51.04) v1(35.23,51.04)
LORA_TXD: length 84.7
  TOP w0.254: v1(51.42,50.06) v1(51.42,7.75) ; v1(36.79,10.17) 36.79,12.88 37.34,13.43 38.41,13.43 38.42,13.44 U12.2
  TOP w0.305: U11.26 35.23,48.91 35.23,50.05 v1(35.21,50.06)
  BOTTOM w0.254: v1(51.42,7.75) 51.42,5.93 50.85,5.36 44.4,5.36 U5.5 42.38,9.36 41.57,10.16 37.31,10.16 37.3,10.17 v1(36.79,10.17) ; v1(35.21,50.06) v1(51.42,50.06)
RM3100_MODE_EN: length 31.8
  TOP w0.254: U1.22 17.36,38.11 17.86,37.61 24.1,37.61 J1.6 29.21,39.74 35.44,39.74 39.23,43.52 U11.34
RM_CS: length 26.9
  TOP w0.254: U11.29 36.73,48.91 36.73,48.01 v1(36.76,47.98) ; U1.3 15.28,41.74 ; 15.28,41.74 16.42,42.88 18.33,42.88 24.27,48.82 J1.1 ; 15.28,41.74 15.28,41.74 15.28,41.07
  BOTTOM w0.254: v1(36.76,47.98) 35.92,48.82 J1.1
RM_DRY: length 29.7
  TOP w0.254: U11.33 38.73,48.91 38.73,48.23 38.73,48.22 38.73,43.73 35.37,40.36 27.29,40.36 J1.5 24.59,38.66 24.05,38.12 17.89,38.12 17.5,38.51 U1.23
RM_MISO: length 25.3
  TOP w0.254: v1(37.47,47.28) 37.47,47.79 37.73,48.05 37.73,48.91 U11.31 ; U1.28 17.44,40.51 23.21,46.28 J1.2
  BOTTOM w0.254: J1.2 36.47,46.28 v1(37.47,47.28)
RM_MOSI: length 27.4
  TOP w0.203: v1(17.33,41.91) 16.3,41.91 16.08,41.69 U1.1
  TOP w0.254: U11.32 38.23,48.91 38.23,46.89 v1(37.6,46.26)
  BOTTOM w0.254: v1(37.6,46.26) 37.6,45.31 36.04,43.74 J1.3 23.76,41.91 v1(17.33,41.91)
RM_POWER: length 19.7
  TOP w0.254: v1(31.04,51.56) 31.54,51.56 31.55,51.56 U11.23 ; T1.1 v1(17.67,47.77)
  BOTTOM w0.254: v1(31.04,51.56) 18.76,51.56 17.67,50.46 v1(17.67,47.77)
RM_SCLK: length 25.8
  TOP w0.254: U11.24 31.84,51.06 30.94,50.17 30.94,42.59 29.56,41.2 J1.4 18.85,41.2 17.76,40.11 U1.27
RST: length 26
  TOP w0.254: U12.1 38.45,13.94 38.42,13.96 37.15,13.96 36.39,13.19 36.39,11.58 35.91,11.1 R9.1 35.27,10.52 35.28,10.51 C48.2 35.32,10.05 v1(35.96,10.05) ; J3.4 27.35,18.31 27.51,18.16 v1(27.51,10.59)
  BOTTOM w0.254: v1(35.96,10.05) 28.05,10.05 v1(27.51,10.59)
RXD: length 14.5
  TOP w0.254: J8.1 54.04,58.54 53.02,59.56 U11.69
RXEN: length 34.5
  TOP w0.203: v1(32.56,12.64) 32.56,31.37 33.32,32.14 37.85,32.14 38.53,32.82 40.2,32.82 40.44,33.06 U14.4
  TOP w0.254: v1(37.98,12.29) 38.13,12.44 U12.4
  BOTTOM w0.254: v1(32.56,12.64) 32.91,12.29 v1(37.98,12.29)
SCLK: length 11.2
  TOP w0.254: U11.76 47.23,65.85 46.31,66.77 40.13,66.77 39.82,67.07 J5.2
SPI_MISO: length 13
  TOP w0.254: U15.16 44.59,20.05 44.6,20.05 45.02,20.05 45.02,20.05 45.13,20.05 45.14,20.04 v1(45.86,20.04) ; U12.19 43.58,12.94 43.59,12.95 v1(45.35,12.95)
  BOTTOM w0.254: v1(45.35,12.95) 45.9,13.5 v1(45.9,19.1) 45.9,19.49 45.86,19.53 v1(45.86,20.04)
SPI_MOSI: length 13.1
  TOP w0.254: U15.17 v1(45.35,20.55) ; v1(44.66,12.21) 44.44,12.44 U12.18
  BOTTOM w0.254: v1(45.35,20.55) 45.35,20.04 45.35,20.03 45.35,13.97 44.66,13.28 v1(44.66,12.21)
SPI_NSS: length 21.2
  TOP w0.203: U15.19 v1(47.25,21.57)
  TOP w0.254: U12.16 43.58,11.44 43.59,11.42 44.03,11.42 44.79,10.67 v1(47.27,10.67)
  BOTTOM w0.203: 47.25,21.06 47.25,21.06 v1(47.25,21.57) ; 47.23,21.6 47.25,21.58
  BOTTOM w0.254: 47.25,21.58 47.25,11.2 47.27,11.17 v1(47.27,10.67)
SPI_SCK: length 17.7
  TOP w0.203: U15.18 v1(46.55,21.05)
  TOP w0.254: v1(46.54,11.19) 44.95,11.19 44.2,11.94 U12.17
  BOTTOM w0.254: v1(46.54,11.19) 46.54,18.95 46.55,18.96 v1(46.55,21.05)
SWDIO: length 17.3
  TOP w0.254: J5.4 v1(51.74,68.69) ; U11.72 49.56,61.06 49.56,61.06 v1(51.74,61.06)
  BOTTOM w0.254: v1(51.74,68.69) v1(51.74,61.06)
SWIM: length 15.1
  TOP w0.254: v1(38.06,14.57) 38.57,14.57 38.75,14.39 U12.28
  BOTTOM w0.254: v1(38.06,14.57) 38.06,13.98 37.3,13.23 J3.2
TXD: length 15.4
  TOP w0.254: J8.2 61.11,57.87 53.7,57.87 52.51,59.06 U11.68
TXEN: length 35.7
  TOP w0.203: v1(31.68,11.55) 31.68,31.36 32.86,32.54 37.49,32.54 38.57,33.61 U14.6
  TOP w0.254: v1(38.04,11.55) 38.42,11.94 U12.5
  BOTTOM w0.254: v1(38.04,11.55) v1(31.68,11.55)
N01396: length 8.6
  TOP w0.203: U1.16 14.08,36.79
  TOP w0.254: 14.08,37.52 14.08,36.79 13.23,35.95 13.23,35.25 13.71,34.77 R1.2 13.71,32.45 12.94,31.68 SX.1
N01588: length 8.6
  TOP w0.203: U1.17 14.48,36.78
  TOP w0.254: SX.2 15.73,31.68 15.42,31.99 R2.2 15.42,34.58 15.87,35.03 15.87,35.39 14.48,36.78 14.48,37.52
N01671: length 5.1
  TOP w0.203: 9.59,39.7 9.6,39.71 U1.10
  TOP w0.254: R3.1 8.91,40.38 9.59,39.7
N01689: length 8.8
  TOP w0.203: U1.11 9.53,39.31 9.52,39.3
  TOP w0.254: SY.1 5.95,39.57 5.95,39.56 5.95,39.22 6.39,38.78 R3.2 9,38.78 9.52,39.3
N01747: length 6.1
  TOP w0.203: U1.13 12.49,38.51 10.12,36.14
  TOP w0.254: 10.12,36.14 9.65,36.14 8.97,35.45 R4.1
N01751: length 9.8
  TOP w0.203: U1.12 12.32,38.91 12.31,38.9
  TOP w0.254: SY.2 5.95,36.59 6.41,37.05 R4.2 8.99,37.05 9.46,36.58 9.99,36.58 12.31,38.9
N01826: length 4.2
  TOP w0.254: R5.1 13.57,43.9 13.04,43.37 13.04,42.91 14.08,41.88 U1.6
N01832: length 6.8
  TOP w0.254: U1.7 13.68,41.63 12.41,42.9 12.41,43.52 11.97,43.96 R5.2 11.97,46.73 SZ.1
N01841: length 7.1
  TOP w0.254: U1.9 11.55,40.11 11.54,40.1 9.44,42.21 9.44,43.34 8.9,43.88 R6.1
N01859: length 9
  TOP w0.254: SZ.2 10.5,46.13 R6.2 10.5,43.72 10.1,43.32 10.1,42.31 11.9,40.5 11.91,40.51 U1.8
N01987: length 5.9
  TOP w0.254: v1(19.56,38.73) 17.97,38.73 17.4,39.31 U1.25 ; R7.2 v1(19.56,36.84)
  BOTTOM w0.254: v1(19.56,36.84) v1(19.56,38.73)
N0020614: length 4.7
  TOP w0.203: 13.68,37.05 13.68,37.05 U1.15
  TOP w0.254: R1.1 12.11,34.63 12.83,35.35 12.83,36.2 13.68,37.05 13.68,37.52
N0020617: length 5.1
  TOP w0.203: U1.18 14.88,36.95
  TOP w0.254: 14.88,37.52 14.88,36.95 16.4,35.43 16.4,35.21 17.02,34.58 R2.1
N39346: length 4.7
  TOP w0.254: U11.21 32.39,52.56 31.77,53.19 31.77,54 31.02,54.74 L1.2
N39977: length 1.8
  TOP w0.254: U11.94 38.23,64.21 38.23,65.27 38.22,65.27 R12.2
N40117: length 17
  TOP w0.254: R13.2 27.6,66.96 27.61,66.95 C13.1 28.53,66.3 29.29,65.54 v1(29.29,58.56) ; v1(32.02,56.06) U11.14
  BOTTOM w0.254: v1(32.02,56.06) 32.02,58.06 31.53,58.56 v1(29.29,58.56)
N69894: length 2.9
  TOP w0.254: 42.24,40.77 43.39,40.77
  TOP w0.305: R8.2 42.24,40.77 42.25,40.76 D1.1
N105609: length 1.9
  TOP w0.305: L13.1 40.04,22.14 40.04,22.11 40.08,22.07 U15.23
N105629: length 4.5
  TOP w0.508: L12.1 39.13,23.93 L13.2 39.14,23.94 C61.2 39.14,25.02 L14.1 39.14,26.15 C60.2
N105665: length 4.8
  TOP w0.305: U15.24 38.82,21.57 38.54,21.85 ; C59.2 36.28,23.03 36.27,23.04 C34.2
  TOP w0.381: 38.54,21.85 37.93,22.46 L12.2
  TOP w0.508: C59.2 L12.2
N105721: length 3.1
  TOP w0.508: U14.5 39.79,34.15 arc(39.64,34.51) 39.28,34.66 38.37,34.66 38.36,34.68 C35.1
N105725: length 2.2
  TOP w0.508: L2.1 35.57,34.69 C37.2 36.62,34.67 C35.2
N105729: length 3
  TOP w0.508: 33.54,35.33 33.56,35.32 L2.2 33.55,34.67 C36.2 ; 33.54,35.33 33.54,35.07 33.54,35.07 ; 33.54,35.33 J4.1
N105809: length 8.8
  TOP w0.508: C29.2 40.39,26.53 C18.2 40.38,27.37 42.26,29.25 42.26,31.46 41.66,32.06 U14.3
N105813: length 3.1
  TOP w0.305: L8.2 40.38,22.48 40.58,22.28 U15.22
  TOP w0.508: L8.2 40.38,23.95 40.39,23.95 C29.1
N105849: length 3.1
  TOP w0.305: L8.1 41.28,22.42 41.08,22.22 U15.21
  TOP w0.508: C63.2 41.38,23.87 41.28,23.77 L8.1
N105989: length 3.1
  TOP w0.508: C62.2 38.05,27.06 C60.1 39.14,27.05 L14.2 39.15,27.06 C58.1
N106013: length 2.3
  TOP w0.508: U14.1 39.14,30.91 L11.2 40.27,30.9 C57.1
N106087: length 1.1
  TOP w0.508: L11.1 C58.2
N106359: length 5.7
  TOP w0.203: U15.4 36.69,19.55 36.52,19.38 35.35,19.38 34.82,18.85 X2.1 34.13,18.85 34.12,18.85 C64.1
N106387: length 4
  TOP w0.203: C65.1 36.12,20.86 X2.3 37.05,19.9 37.2,20.05 U15.3
N106409: length 8.7
  TOP w0.508: L7.2 34.33,15.43 34.72,15.04 37.39,15.04 37.6,15.25 38.42,15.25 40.58,17.41 U15.9
N106429: length 5.6
  TOP w0.203: C40.2 36.24,16.92 36.23,16.9 L7.1
  TOP w0.508: L7.1 37.77,16.1 39.58,17.91 U15.7
N3877695: length 9
  TOP w0.254: 45.23,41.74 U11.46 ; 44.99,41.5 44.99,40.77
  TOP w0.305: D1.2 44.94,41.45 45.23,41.74

## Copper pours and planes (outline as drawn; the poured copper is in the pictures)
GND on TOP: 12.48,57.55 20.45,65.52 15.79,70.18 66.49,66.49 70.18,15.79 65.52,20.45 57.55,12.48 62.21,7.82 11.52,11.52 7.82,62.21 ; 6 cut-outs
GND on BOTTOM: 12.48,57.55 20.45,65.52 15.79,70.18 66.49,66.49 70.18,15.79 65.52,20.45 57.55,12.48 62.21,7.82 11.52,11.52 7.82,62.21 ; 1 cut-out

## Text on the board
Ref Des/Silkscreen Top: GND | SCLK | MODE | RF_VCC | DRY | MOSI | CS | MISO | SWIM | 3.3V | RST | TXD | RXD | VCC | SWCLK | SWDIO | A | AUX | B | VBAT
NCLEGEND-1-2: FIGURE | SIZE | 12.0 | 20.0 | 35.429 | 35.433 | 157.48 | DRILL CHART: TOP to BOTTOM | ALL UNITS ARE IN MILS | PLATED | QTY | 68 | 574 | 2 | 33
